# Altium PCB GPSR_v2.PcbDoc
Units mm, origin at the board's own origin, x right, y up, seen from the top; angles counter-clockwise.
Board outline 68.59 x 62.99 mm, 4 copper layers (Top, Inner Layer 2, Inner Layer 3, Bottom), stack 0.137 mm thick; 118 components, 78 nets, 386 pads, 223 vias.
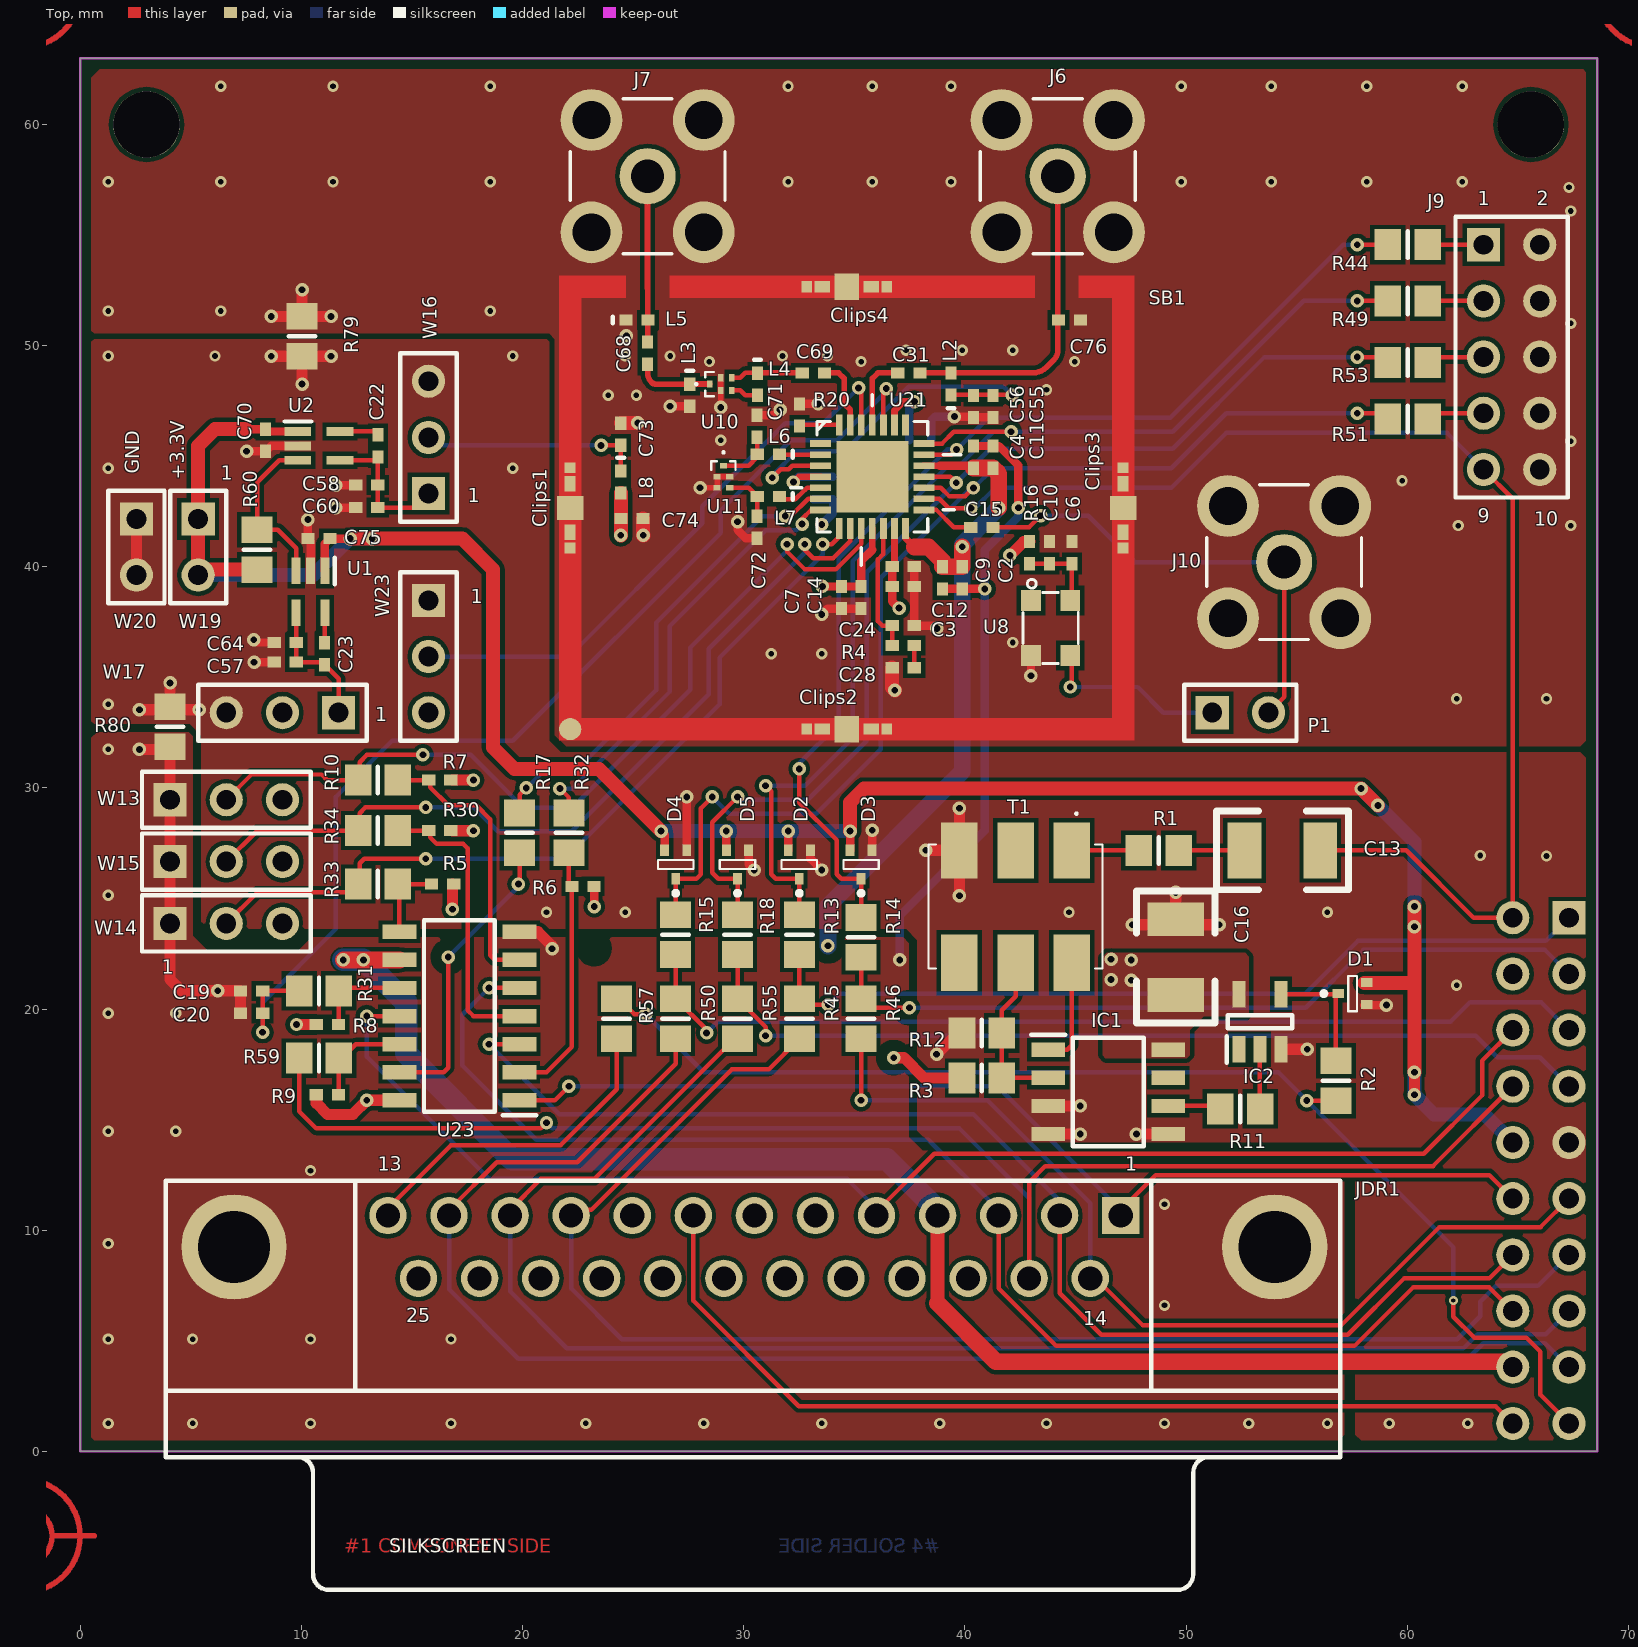
[diagram p0: Top view]
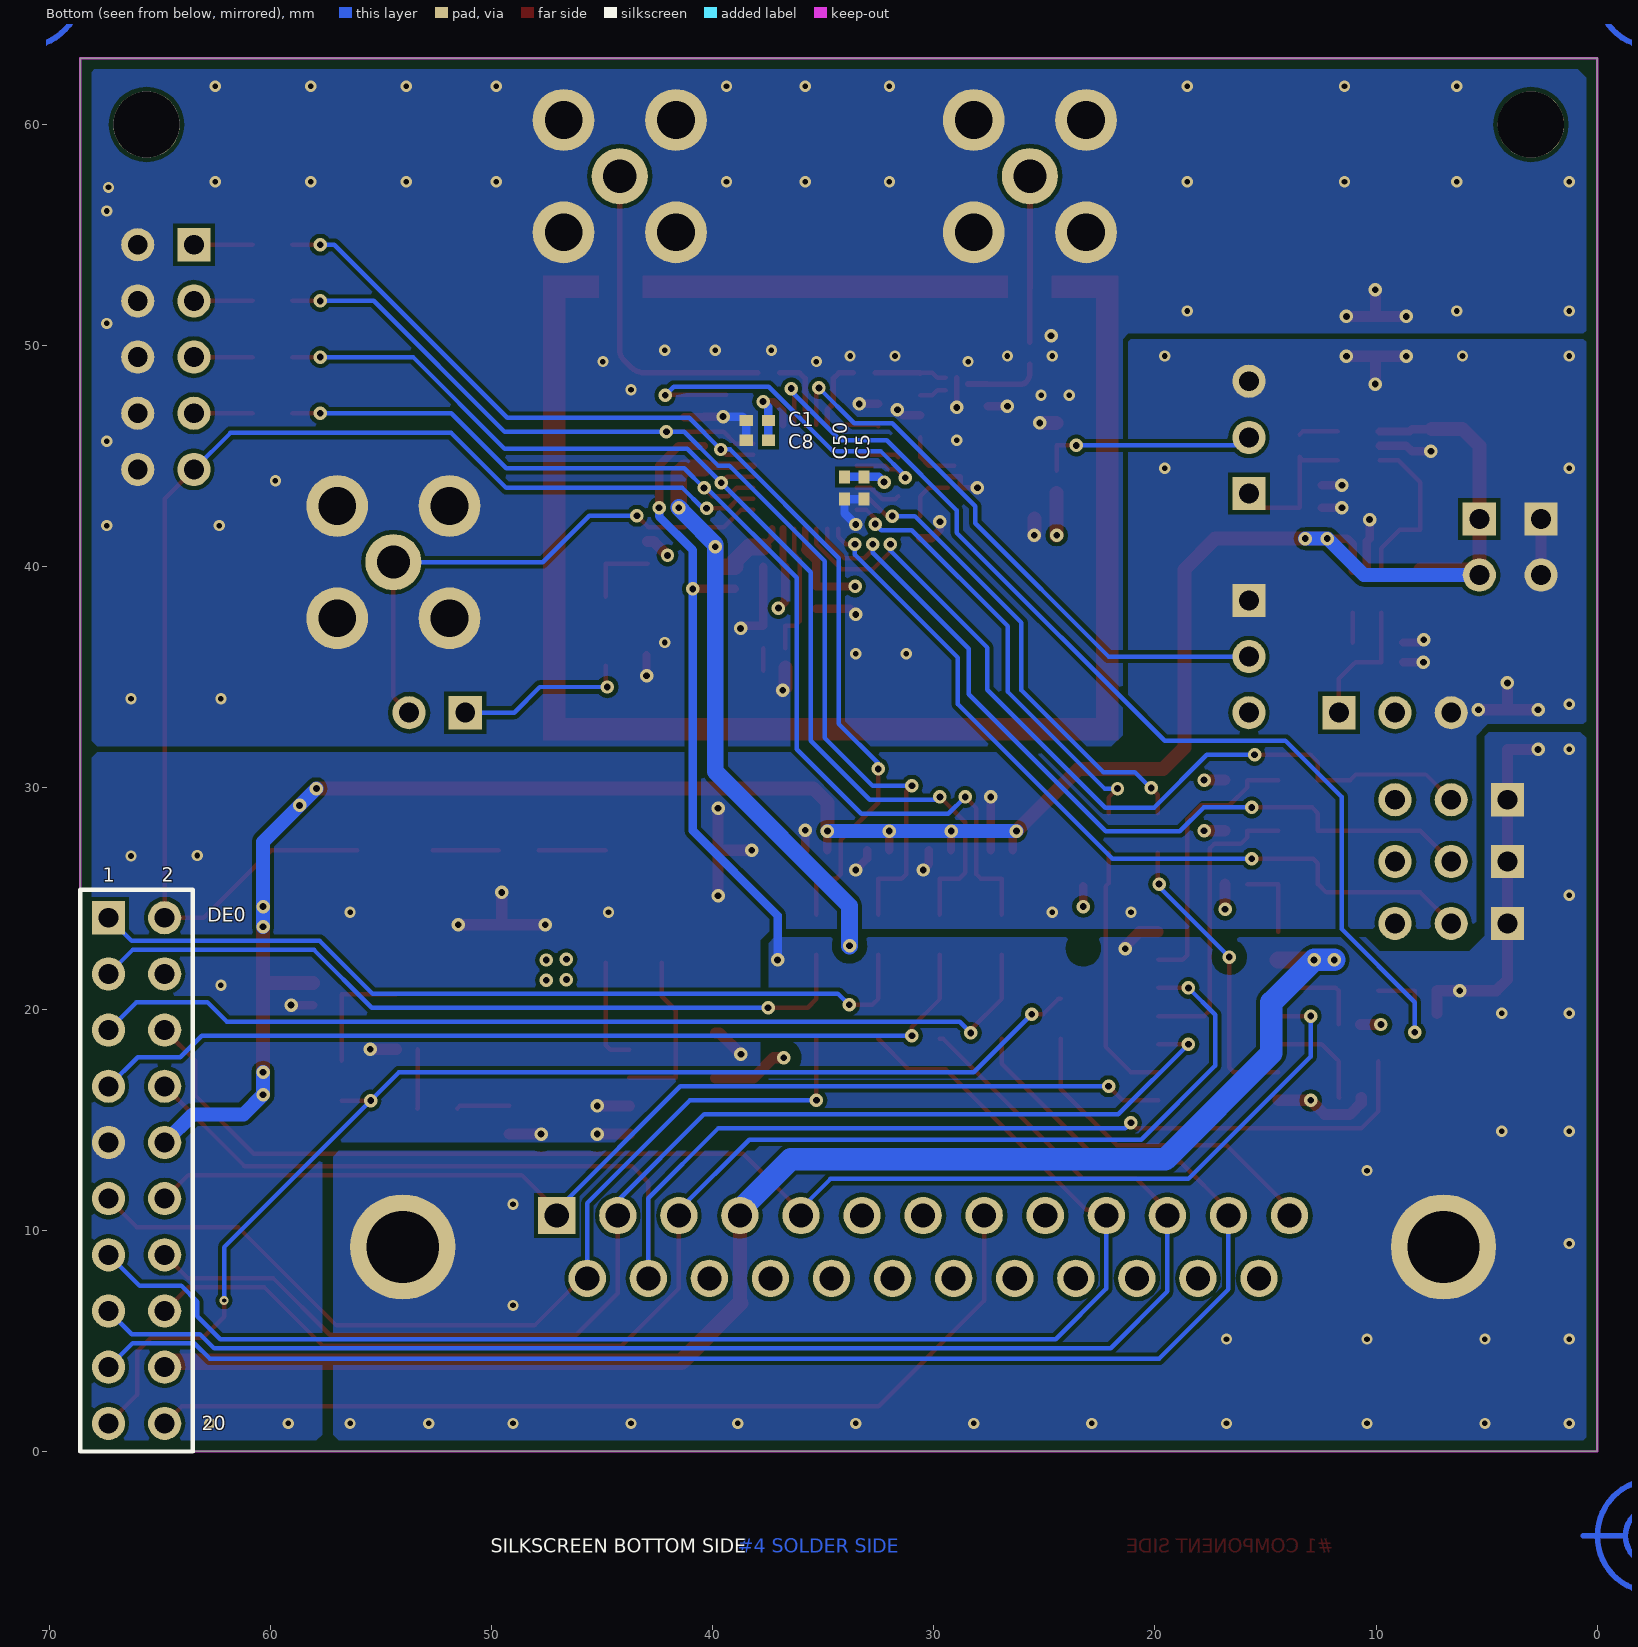
[diagram p1: Bottom view, seen from below]
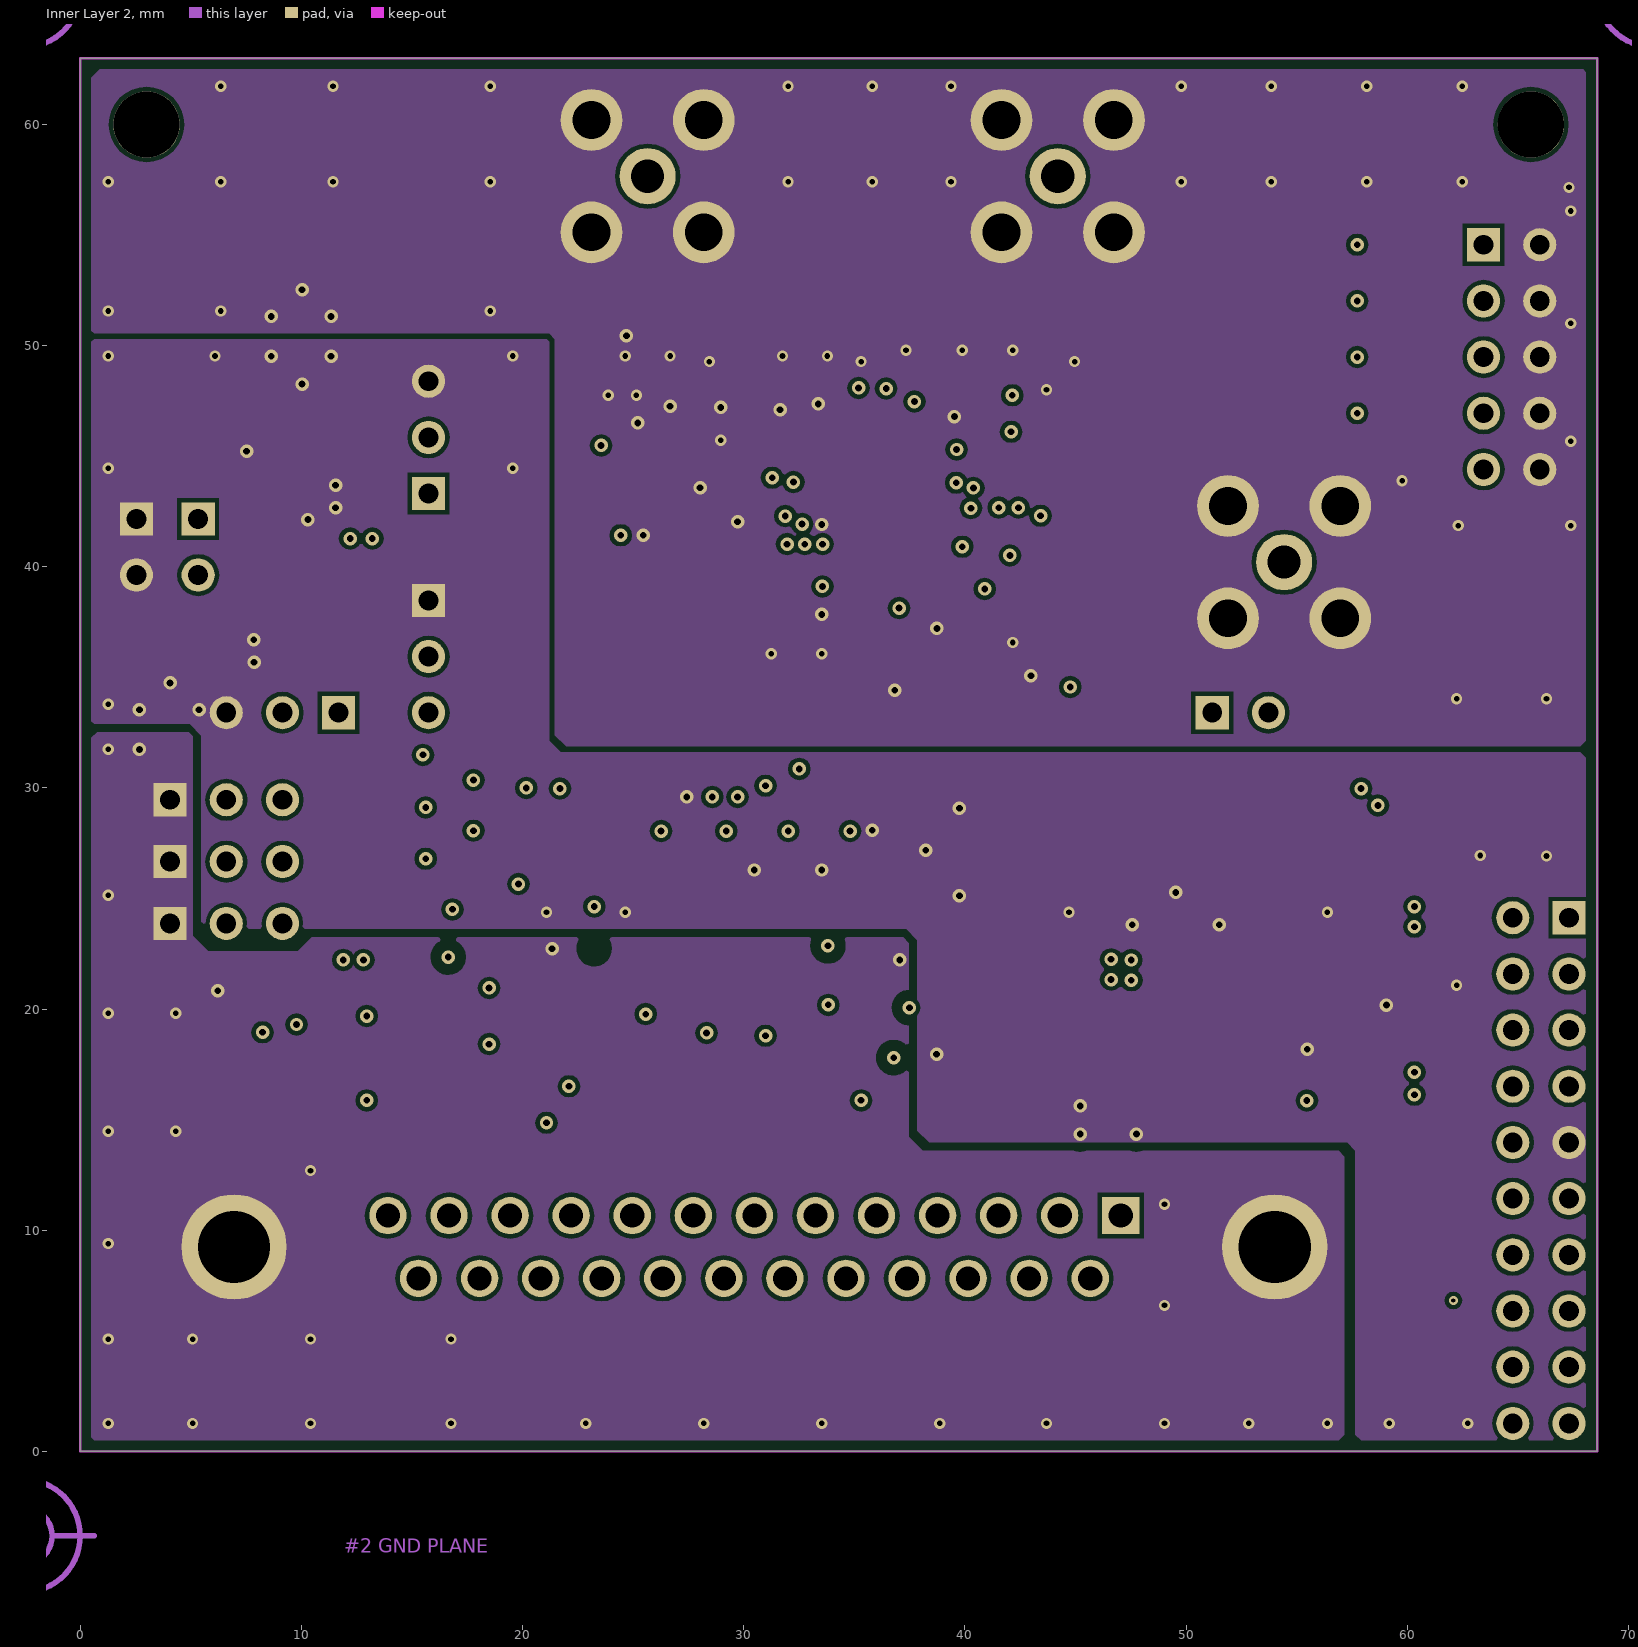
[diagram p2: Inner Layer 2]
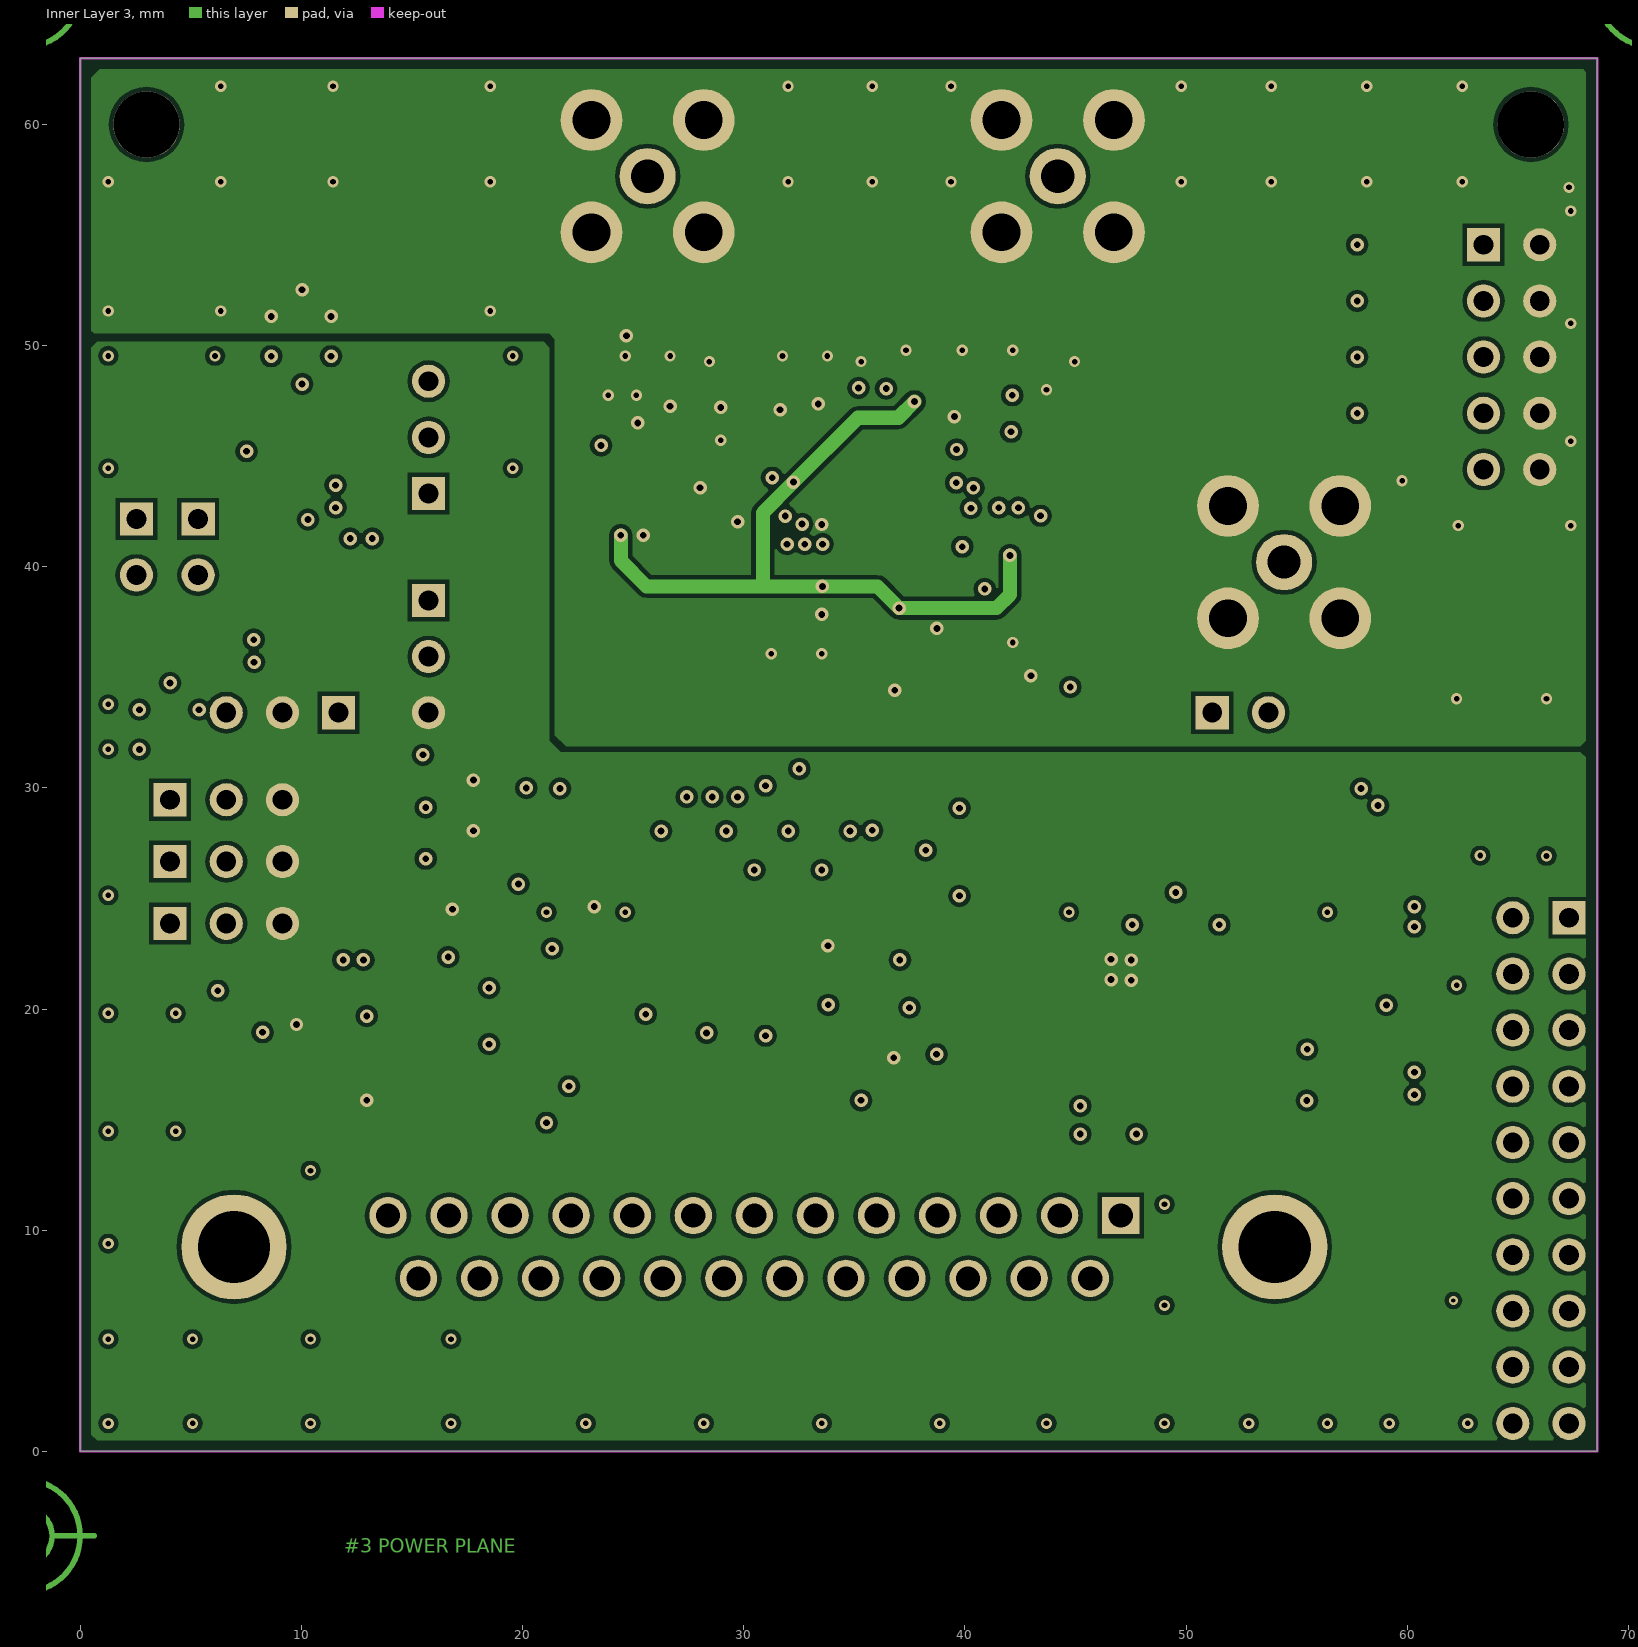
[diagram p3: Inner Layer 3]

## Layer stack, top to bottom
Solder Mask Top: solder mask 0.0102, Solder Resist, Dk 3.5
Top: signal copper 0.0343
Inner Layer 2: signal copper 0.0343
Inner Layer 3: signal copper 0.0343
Bottom: signal copper 0.0343
Solder Mask Bottom: solder mask 0.0102, Solder Resist, Dk 3.5

## Board outline
0,0 68.59,0 68.59,62.992 0,62.992

## Design rules (kind name [scope] priority, off if disabled: settings)
Clearance [All] p1: gap=0.191 ignorepadtopadclearanceinfootprint=FALSE except(0: Arc-Hole Track-Hole SMDPad-Hole THPad-Hole Via-Hole Fill-Hole Poly-Hole Region-Hole Text-Hole)
ComponentClearance "'Default' PADS rule_12" [All] p1 off: gap=0.203 collisioncheckmode=3 verticalgap=0.254 showdistances=FALSE
FlightTimeFalling "'Default' PADS rule_10" [All] p1: maximum=10.00
FlightTimeRising "'Default' PADS rule_9" [All] p1: maximum=10.00
Height [All] p1 off: minheight=0 maxheight=25.4 prefheight=12.7
HoleSize [All] p1: absolutevalues=TRUE maxlimit=3.81 minlimit=0.025 maxpercent=80.000 minpercent=20.000
HoleToHoleClearance [All] p1: gap=0.102 allowstackedmicrovias=TRUE
Length "'Default' PADS rule_5" [All] p1: maxlimit=1270 minlimit=0
MatchedLengths "'Default' PADS rule_11" [InNetClass('All Nets')] p1 off: tolerance=5.08 checknetsindiffpair=TRUE checkdiffpairvsdiffpair=FALSE checkxsignals=FALSE checkothers=FALSE
MaxMinImpedance "'Default' PADS rule_8" [All] p1: minimum=50.00 maximum=150.0
MinimumSolderMaskSliver [All] p1 off: minsoldermaskwidth=0.254
ParallelSegment "'Default' PADS rule_7" [All] p1: limit=25.4 gap=5.08
ParallelSegment "'Default' PADS rule_6" [All] p2: limit=25.4 gap=5.08
PasteMaskExpansion [All] p1 off: expansion=0
PlaneClearance "'Default' PADS rule_14" [All] p1: clearance=0.508
PlaneConnect [All] p1: planeconnectstyle=Direct reliefexpansion=0.508 reliefentries=4 reliefconductorwidth=0.254 reliefairgap=0.254
PolygonConnect PolygonConnect_1 [All] p1: connectstyle=Direct reliefconductorwidth=0.254 reliefentries=4 polygonreliefangle="90 Angle" airgapwidth=0.254
RoutingLayers "'Default' PADS rule_3" [All] p1: top layer_v5=TRUE mid layer 1_v5=TRUE mid layer 2_v5=TRUE bottom layer_v5=TRUE
RoutingPriority "'Default' PADS rule_2" [All] p1: routingpriority=3
RoutingTopology "'Default' PADS rule" [All] p1: topology=Shortest
RoutingVias "'Default' PADS rule_4" [All] p1: holewidth=0.94 width=1.397 viastyle="Through Hole" minholewidth=0.94 minwidth=1.397 maxholewidth=0.94 maxwidth=1.397
SMDToCorner "'Default' PADS rule_16" [All] p1 off: distance=76000
SMDToPlane "'Default' PADS rule_17" [All] p1 off: distance=120000
SilkToSilkClearance [All] p1 off: silktosilkclearance=0.254
SilkToSolderMaskClearance SilkscreenOverComponentPads [IsPad] p1 off: minsilkscreentomaskgap=0.254 clearancetoexposedcopper=TRUE
SolderMaskExpansion [All] p1: expansion=0.076 istentingtop=FALSE
Width "'Default' PADS rule_13" [All] p1: maxlimit=1.524 minlimit=0.203 preferedwidth=0.203
17 further rules are at their usual default settings.

## Components (designator, comment, footprint, x,y, rotation, side; value= is the part's Value field where it differs from the comment)
C1 "100pF" C0402 37.973,46.609 r0 bottom
C2 "0.1uF" C0402 39.878,39.497 r270 top
C3 "0.1uF" C0402 37.211,39.116 r0 top
C4 "100pF" C0402 40.386,44.958 r90 top
C5 "100pF" C0402 33.147,43.561 r270 bottom
C6 "10uF" C0402 44.831,40.64 r90 top
C7 "0.1uF" C0402 34.417,38.608 r270 top
C8 "0.1uF" C0402 37.973,45.72 r0 bottom
C9 "100pF" C0402 38.989,39.497 r270 top
C10 "100pF" C0402 43.815,40.64 r90 top
C11 "0.1uF" C0402 41.275,44.958 r90 top
C12 "100pF" C0402 37.211,40.005 r0 top
C13 "10nF" C1210 54.356,27.178 r180 top
C14 "100pF" C0402 35.306,38.608 r270 top
C15 "10nF" C0402 40.767,41.783 r180 top
C16 "0.1uF" C1210 49.53,22.352 r270 top
C19 "0.1uF" C0402 7.747,20.828 r0 top
C20 "100pF" C0402 7.747,19.812 r0 top
C22 "0.1uF" C0402 13.462,45.466 r90 top
C23 "0.1uF" C0402 11.049,36.068 r90 top
C24 "27pF" C0402 37.211,37.338 r0 top
C28 "0.47nF" C0402 37.211,35.433 r180 top
C31 "100pF" C0402 37.465,48.768 r0 top
C50 "0.1uF" C0402 34.036,43.561 r270 bottom
C55 "0.1uF" C0402 41.275,47.244 r270 top
C56 "100pF" C0402 40.386,47.244 r270 top
C57 "10nF" C0402 9.271,35.687 r180 top
C58 "10nF" C0402 12.954,43.688 r180 top
C60 "1uF" C0402 12.954,42.672 r0 top
C64 "1uF" C0402 9.271,36.576 r0 top
C68 "100pF" C0402 25.654,49.657 r90 top
C69 "100pF" C0402 33.147,48.768 r180 top
C70 "1uF" C0402 8.382,45.72 r90 top
C71 "NC" C0402 30.607,46.355 r90 top
C72 "NC" C0402 30.607,41.783 r90 top
C73 "1uF" C0402 24.44,45.993 r270 top
C74 "1uF" C0402 24.948,42.183 r180 top
C75 "1uF" C0402 10.795,41.275 r180 top
C76 "NC" C0402 44.729,51.156 r180 top
Clips1 "S0951-46R" S0951-46R 22.154,42.658 r90 top
Clips2 "S0951-46R" S0951-46R 34.654,32.658 r0 top
Clips3 "S0951-46R" S0951-46R 47.154,42.658 r90 top
Clips4 "S0951-46R" S0951-46R 34.654,52.658 r0 top
D1 "BAT54STA" BAT54STA 57.15,20.701 r90 top
D2 "BAT54STA" BAT54STA 32.512,26.162 r180 top
D3 "BAT54STA" BAT54STA 35.306,26.162 r180 top
D4 "BAT54STA" BAT54STA 26.924,26.162 r180 top
D5 "BAT54STA" BAT54STA 29.718,26.162 r180 top
DE0 "Female Header 10X2" HDR2X10 67.31,24.13 r270 bottom
IC1 "MAX961ESA+" SOIC127P600X175-8N 46.482,16.256 r0 top
IC2 "SN74LV1T34DBVRG4" SOT95P280X145-5N 53.34,19.431 r90 top
J6 "SMA" SMA-JACK 44.196,57.658 r0 top
J7 "SMA" SMA-JACK 25.654,57.658 r0 top
J9 "Header 5X2" HDR2X5 63.449,54.559 r270 top
J10 "SMA" SMA-JACK 54.432,40.208 r0 top
JDR1 "D Connector 25" DSUB1.385-2H25A 30.48,-0.254 r180 top
L2 "33nH" 0402-A 39.37,48.26 r90 top
L3 "NC" 0402-A 27.559,47.752 r270 top
L4 "NC" 0402-A 30.615,48.252 r270 top
L5 "33nH" 0402-A 25.171,51.156 r0 top
L6 "0R" 0402-A 31.115,45.085 r180 top
L7 "0R" 0402-A 31.115,43.18 r180 top
L8 "0R_Bead" 0402-A 24.44,43.834 r270 top
P1 "Header 2" HDR1X2 51.181,33.401 r0 top
R1 "0R" 6-0805_N 48.768,27.178 r180 top
R2 "47R" 6-0805_N 56.769,16.764 r90 top
R3 "5.1K" 6-0805_N 40.767,16.891 r180 top
R4 "20K" R0402 37.211,36.449 r180 top
R5 "10K" R0402 16.383,25.654 r0 top
R6 "10K" R0402 22.733,25.552 r0 top
R7 "10K" R0402 16.256,30.353 r0 top
R8 "10K" R0402 11.176,19.304 r180 top
R9 "10K" R0402 11.176,16.129 r0 top
R10 "0R" 6-0805_N 13.462,30.353 r180 top
R11 "0R" 6-0805_N 52.451,15.494 r0 top
R12 "5.1K" 6-0805_N 40.767,18.923 r0 top
R13 "47R" 6-0805_N 32.512,23.368 r90 top
R14 "47R" 6-0805_N 35.306,23.241 r90 top
R15 "47R" 6-0805_N 26.924,23.368 r90 top
R16 "22.1R" R0402 42.926,40.64 r270 top
R17 "0R" 6-0805_N 19.863,27.965 r90 top
R18 "47R" 6-0805_N 29.718,23.368 r90 top
R20 "100K" R0402 32.512,46.863 r270 top
R30 "10K" R0402 16.256,28.067 r0 top
R31 "0R" 6-0805_N 10.795,20.828 r0 top
R32 "0R" 6-0805_N 22.098,27.965 r90 top
R33 "0R" 6-0805_N 13.462,25.654 r180 top
R34 "0R" 6-0805_N 13.462,28.067 r180 top
R44 "0R" 6-0805_N 60.02,54.559 r180 top
R45 "0R" 6-0805_N 32.512,19.558 r90 top
R46 "0R" 6-0805_N 35.306,19.558 r90 top
R49 "0R" 6-0805_N 60.02,52.019 r180 top
R50 "0R" 6-0805_N 26.924,19.558 r90 top
R51 "0R" 6-0805_N 60.02,46.685 r180 top
R53 "0R" 6-0805_N 60.02,49.225 r180 top
R55 "0R" 6-0805_N 29.718,19.558 r90 top
R57 "0R" 6-0805_N 24.257,19.558 r90 top
R59 "0R" 6-0805_N 10.795,17.78 r0 top
R60 "0R" 6-0805_N 8.001,40.767 r90 top
R79 "0R" 6-0805_N 10.033,50.419 r90 top
R80 "0R" 6-0805_N 4.064,32.766 r270 top
SB1 "S02-25200300" S02-25200300 22.154,32.658 r0 top
T1 "ADT1-6T+" ADT16T 42.291,24.638 r180 top
U1 "MAX8510EXK29+T" SOT65P210X110-5N 10.414,38.862 r270 top
U2 "MAX8510EXK29+T" SOT65P210X110-5N 10.795,45.466 r0 top
U8 "D32G-016.368M" OSC3225 43.871,37.23 r180 top
U10 "SF14-1575F5UUA1" SF141575F5UUA1 28.956,48.26 r0 top
U11 "RSF-1575.420-2000-1411-TR" SF141575F5UUA1 29.083,44.069 r270 top
U21 "MAX2769ETI+" TQFN28P$5C$0.5 35.814,44.069 r0 top
U23 "SN74LV07ADR" SOIC127P600X175-14N 17.145,19.685 r180 top
W13 "Header 1x3" HDR1X3 4.064,29.464 r0 top
W14 "Header 1x3" HDR1X3 4.064,23.876 r0 top
W15 "Header 1x3" HDR1X3 4.064,26.67 r0 top
W16 "Header 1x3" HDR1X3 15.748,43.307 r90 top
W17 "Header 1x3" HDR1X3 11.684,33.401 r180 top
W19 "Header 2" HDR1X2 5.334,42.164 r270 top
W20 "Header 2" HDR1X2 2.54,42.164 r270 top
W23 "Header 1x3" HDR1X3 15.748,38.481 r270 top

## Footprints (in the part's own frame and the unit in brackets; to place one, negate y for a bottom-side part, rotate by r counter-clockwise, add the part's x,y. Pads: shape width x height; smd on the part's side, far side on the other; paste and mask are expansions set on the pad)
6-0805_N [mm] "Chip Resistor, Body 2.0x1.2mm, IPC Medium Density"
  rect 1.2x1.4 smd: 1(-0.9,0) 2(0.9,0)
  silkscreen extent 0,-0.6 0,0.6, body extent -1.07,-0.7 1.07,0.7, height 0.7
0402-A [mm] "Chip Inductor, Body 1.0x0.5mm, IPC High Density"
  rect 0.6x0.5 smd: 1(-0.5,0) 2(0.5,0)
  silkscreen extent -1.1,-0.15 -1.1,0.15, body extent -0.55,-0.3 0.55,0.3, height 0.55
ADT16T [mm]
  rect 1.65x2.54 smd: 1(-2.54,-2.54) 2(0,-2.54) 3(2.54,-2.54) 4(2.54,2.54) 5(0,2.54) 6(-2.54,2.54)
  silkscreen extent -3.94,-4.25 3.94,2.8
BAT54STA [mm]
  rect 0.4x0.51 smd: 1(0,0.268) 2(0.5,-1.022) 3(-0.5,-1.022)
  silkscreen extent -0.8,-0.58 0.8,1.02
C0402 [mm]
  rect 0.6x0.5 smd: 1(-0.5,0) 2(0.5,0)
  body extent -0.55,-0.3 0.55,0.3, height 1.3
C1210 [mil]
  rect 60x100 smd: 1(-67.5,0) 2(67.5,0)
  silkscreen extent -118,-70 118,70
DSUB1.385-2H25A [mm] "Connector; D Subminiature; 25 Position; Right Angle; Pitch 1.385 mm"
  rect 1.69x1.69 hole 1.09: 1(-16.566,-10.92)
  round 1.69 hole 1.09: 2(-13.805,-10.92) 3(-11.044,-10.92) 4(-8.283,-10.92) 5(-5.522,-10.92) 6(-2.761,-10.92) 7(0,-10.92) 8(2.761,-10.92) 9(5.522,-10.92) 10(8.283,-10.92) 11(11.044,-10.92) 12(13.805,-10.92) 13(16.566,-10.92) 14(-15.185,-8.08) 15(-12.424,-8.08) 16(-9.663,-8.08) 17(-6.902,-8.08) 18(-4.141,-8.08) 19(-1.38,-8.08) 20(1.381,-8.08) 21(4.142,-8.08) 22(6.903,-8.08) 23(9.664,-8.08) 24(12.425,-8.08) 25(15.186,-8.08)
  round 4.76 hole 3.26: 26(-23.526,-9.5) 27(23.526,-9.5)
  silkscreen extent -26.5,-12.5 26.6,6
HDR1X2 [mm] "Connector; Header; 2 Position"
  rect 1.5x1.5 hole 0.9: 1(0,0)
  round 1.5 hole 0.9: 2(2.54,0)
  silkscreen extent -1.27,-1.27 3.81,1.27
HDR1X3 [mm] "Connector; Header; 3 Position"
  rect 1.5x1.5 hole 0.9: 1(0,0)
  round 1.5 hole 0.9: 2(2.54,0) 3(5.08,0)
  silkscreen extent -1.27,-1.27 6.35,1.27
HDR2X5 [mm] "Connector; Header; 5x2 Position"
  rect 1.5x1.5 hole 0.9: 1(0,0)
  round 1.5 hole 0.9: 2(0,2.54) 3(2.54,0) 4(2.54,2.54) 5(5.08,0) 6(5.08,2.54) 7(7.62,0) 8(7.62,2.54) 9(10.16,0) 10(10.16,2.54)
  silkscreen extent -1.27,-1.27 11.43,3.81
HDR2X10 [mm] "Connector; Header; 10x2 Position"
  rect 1.5x1.5 hole 0.9: 1(0,0)
  round 1.5 hole 0.9: 2(0,2.54) 3(2.54,0) 4(2.54,2.54) 5(5.08,0) 6(5.08,2.54) 7(7.62,0) 8(7.62,2.54) 9(10.16,0) 10(10.16,2.54) 11(12.7,0) 12(12.7,2.54) 13(15.24,0) 14(15.24,2.54) 15(17.78,0) 16(17.78,2.54) 17(20.32,0) 18(20.32,2.54) 19(22.86,0) 20(22.86,2.54)
  silkscreen extent -1.27,-1.27 24.13,3.81
OSC3225 [mm]
  rect 0.89x0.94 smd: 1(0.885,-1.24) 2(0.885,1.24) 3(-0.885,1.24) 4(-0.885,-1.24)
  silkscreen extent -1.25,-2.2 1.25,1.6
R0402 [mm]
  rect 0.6x0.5 smd: 1(-0.5,0) 2(0.5,0)
  body extent -0.55,-0.3 0.55,0.3, height 1.3
S02-25200300 [mm]
  round 1 smd: 1(0,0)
  Top region: 2.5,20.5 2.5,19.5 0.5,19.5 0.5,20.5
  Top region: 24.5,19.5 23,19.5 23,20.5 24.5,20.5
  Top region: -0.5,20.5 0.5,20.5 0.5,-0.5 -0.5,-0.5
  Top region: 0.5,-0.5 25.5,-0.5 25.5,0.5 0.5,0.5
  Top region: 25.5,0.5 25.5,20.5 24.5,20.5 24.5,0.5
  Top region: 4.5,19.5 4.5,20.5 21,20.5 21,19.5
S0951-46R [mm]
  rect 0.7x0.5 smd: 1(-1.1,0) 2(1.1,0)
  rect 0.48x0.5 smd: 3(-1.81,0) 4(1.81,0)
  rect 1.1x1.2 smd: 5(0,0)
SF141575F5UUA1 [mm]
  rect 0.25x0.325 smd: 1(-0.5,0) 2(0,-0.287) 3(0.5,-0.287) 4(0.5,0.287) 5(0,0.287)
  silkscreen extent -1.15,-0.55 -0.3,0.55, body extent -0.7,-0.55 0.7,0.55, height 0.8
SMA-JACK [mil]
  round 100 hole 59: 1(0,0)
  round 110 hole 67: 2(-100,-100) 3(-100,100) 4(100,100) 5(100,-100)
  silkscreen extent -138,-138 138,138
SOIC127P600X175-8N [mm]
  rect 1.525x0.65 smd: 1(-2.712,1.905) 2(-2.712,0.635) 3(-2.712,-0.635) 4(-2.712,-1.905) 5(2.712,-1.905) 6(2.712,-0.635) 7(2.712,0.635) 8(2.712,1.905)
  silkscreen extent -3.47,-2.45 1.6,2.58, body extent -3,-2.45 3,2.45, height 1.75
SOIC127P600X175-14N [mm]
  rect 1.525x0.65 smd: 1(-2.712,3.81) 2(-2.712,2.54) 3(-2.712,1.27) 4(-2.712,0) 5(-2.712,-1.27) 6(-2.712,-2.54) 7(-2.712,-3.81) 8(2.712,-3.81) 9(2.712,-2.54) 10(2.712,-1.27) 11(2.712,0) 12(2.712,1.27) 13(2.712,2.54) 14(2.712,3.81)
  silkscreen extent -3.47,-4.33 1.6,4.48, body extent -3.01,-4.33 3.01,4.33, height 1.75
SOT65P210X110-5N [mm]
  rect 1.2x0.4 smd: 1(-0.95,0.65) 2(-0.95,0) 3(-0.95,-0.65) 4(0.95,-0.65) 5(0.95,0.65)
  silkscreen extent -1.55,1.1 -0.35,1.1, body extent -1.05,-1 1.05,1, height 1
SOT95P280X145-5N [mm]
  rect 1.2x0.6 smd: 1(-1.25,0.95) 2(-1.25,0) 3(-1.25,-0.95) 4(1.25,-0.95) 5(1.25,0.95)
  silkscreen extent -1.85,-1.45 0.3,1.5, body extent -1.4,-1.45 1.4,1.45, height 1.2
TQFN28P$5C$0.5 [mil]
  rect 37x12 smd: 1(-92.13,59.06) 2(-92.13,39.37) 3(-92.13,19.69) 4(-92.13,0) 5(-92.13,-19.68) 6(-92.13,-39.37) 7(-92.13,-59.06) 15(92.13,-59.06) 16(92.13,-39.37) 17(92.13,-19.68) 18(92.13,0) 19(92.13,19.69) 20(92.13,39.37) 21(92.13,59.06)
  rect 12x37 smd: 8(-59.06,-92.13) 9(-39.37,-92.13) 10(-19.69,-92.13) 11(0,-92.13) 12(19.68,-92.13) 13(39.37,-92.13) 14(59.06,-92.13) 22(59.06,92.13) 23(39.37,92.13) 24(19.68,92.13) 25(0,92.13) 26(-19.69,92.13) 27(-39.37,92.13) 28(-59.06,92.13)
  rect 128x128 smd: 29(0,0)
  silkscreen extent -146,-157 157,146

## Part data
C1 C2 C3 C4 C5 C6 C7 C8 C9 C10 C11 C12 C14 C15 C19 C20 C22 C23 C24 C28 C31 C50 C55 C56 C57 C58 C60 C64 C68 C69 C70 C71 C72 C73 C74 C75 C76: library part "Cap Semi", "Capacitor (Semiconductor SIM Model)"
C13 C16: library part Cap, "Capacitor"
Clips1 Clips2 Clips3 Clips4 SB1: library part ShieldingBox-3pin-27x17
D1 D2 D3 D4 D5: "Schottky Diode"
DE0: library part "Header 10X2", "Female Header, 10-Pin, Dual row"
IC1 IC2: "Integrated Circuit"
J6 J7 J10: library part COAX-F
J9: "Header, 5-Pin, Dual row"
JDR1: "Receptacle Assembly, 25 Position, Right Angle"
L2 L3 L4 L5 L6 L7 L8: library part Inductor, "Inductor"
P1 W19 W20: "Header, 2-Pin"
R1 R2 R3 R11 R12 R13 R14 R15 R18: library part Res1, "Resistor"
R4 R5 R6 R7 R8 R9 R10 R16 R17 R20 R30 R31 R32 R33 R34 R44 R45 R46 R49 R50 R51 R53 R55 R57 R59 R60 R79 R80: library part Res3, "Resistor"
T1: "Transformer"
U1 U2: library part MAX8510EXK29+
U8 U10 U11: library part Component_1
U21: "GPS IC"
W13 W14 W15 W16 W17 W23: library part "Header 3", "Header, 3-Pin"

## Free pads (board coordinates)
  round 3 hole 3 unplated: 3(3,59.992) 3(65.59,59.992)

## Via types
v1: diameter 0.61, hole 0.305, Top to Bottom, tented both sides, 131 vias
v2: diameter 0.508, hole 0.254, Top to Bottom, tented both sides, 91 vias
v3: diameter 0.4, hole 0.2, Top to Bottom, tented both sides, 1 vias

## Nets (pads, with @x,y where several pads share a name; then routed paths per layer and width w, separated by ;. In a path a pad name is that pad's centre, name@x,y a point inside that pad or via, vN(x,y) a via of type N, cw(c..) or ccw(c..) an arc to the next point about the centre after c; other vN are vias at no path point)
3.3V: C70.2 C75.1 D1.2 D2.2 D3.2 D4.2 D5.2 DE0.10 R60.1 U1.1 U2.1 W19.1 W19.2 | length 111
  Top w0.381: 7.501,46.22 C70.2 8.486,46.116 U2.1 ; U1.1 11.064,41.044 11.295,41.275 v1(12.204,41.275) ; v1(26.264,28.049) 26.424,27.888 D4.2@26.424,27.184 ; v1(29.21,28.049) 29.21,27.94 29.218,27.932 D5.2@29.218,27.184 ; D2.2@32.012,27.184 v1(32.012,28.049) ; D3.2@34.806,27.184 v1(34.806,28.049)
  Top w0.508: v1(60.325,16.129) v1(60.325,17.145)
  Top w0.635: 7.501,46.22 6.088,46.22 5.334,45.466 W19.1 W19.2 5.577,39.867 R60.1 ; v1(12.204,41.275) v1(13.208,41.275) 17.272,41.275 18.669,39.878 18.669,31.826 19.634,30.861 23.451,30.861 v1(26.264,28.049) ; v1(34.806,28.049) 34.806,29.337 35.441,29.972 v1(57.912,29.972) v1(58.674,29.21) ; D1.2@58.059,21.181 58.172,21.181 60.297,21.181 60.325,21.209 ; v1(60.325,17.145) 60.325,21.209 ; v1(60.325,24.638) v1(60.325,23.724) 60.325,21.209
  Bottom w0.635: W19.2 10.553,39.624 v1(12.204,41.275) v1(13.208,41.275) ; v1(26.264,28.049) v1(29.21,28.049) v1(32.012,28.049) v1(34.806,28.049) ; v1(57.912,29.972) v1(58.674,29.21) 60.325,27.559 v1(60.325,24.638) v1(60.325,23.724) ; v1(60.325,17.145) v1(60.325,16.129) 61.214,15.24 63.5,15.24 DE0.10
AGND: C1.2 C3.2 C5.2 C6.2 C7.2 C8.2 C10.2 C12.2 C14.2 C24.2 C28.2 C50.2 C55.2 C56.2 C71.2 C72.1 C73.1 C74.1 C76.1 Clips1.1 Clips1.2 Clips1.3 Clips1.4 Clips1.5 Clips2.1 Clips2.2 Clips2.3 Clips2.4 Clips2.5 Clips3.1 Clips3.2 Clips3.3 Clips3.4 Clips3.5 Clips4.1 Clips4.2 Clips4.3 Clips4.4 Clips4.5 J6.2 J6.3 J6.4 J6.5 J7.2 J7.3 J7.4 J7.5 J9.2 J9.4 J9.6 J9.8 J9.10 J10.2 J10.3 J10.4 J10.5 L3.2 L5.1 R20.1 R79.2 SB1.1 U8.2 U10.2 U10.5 U11.2 U11.3 U11.5 | length 26.6
  Top w0.254: v1(28.024,43.569) U11.3 U11.2 U11.5 ; v1(28.956,47.201) U10.2 U10.5
  Top w0.381: v1(26.67,47.252) L3.2 ; v1(29.718,42.037) 29.718,41.664 30.099,41.283 C72.1 ; C71.2 31.402,46.855 v1(31.644,47.097) ; R20.1 v1(33.372,47.363) ; v1(33.528,37.846) 33.79,38.108 C7.2 C14.2 ; C12.2 C3.2 C24.2 38.608,37.338 v1(38.735,37.211) ; v1(39.526,46.789) 40.365,46.789 40.386,46.768 41.275,46.768 C55.2@41.283,46.768 ; v1(42.982,35.071) 42.986,35.075 U8.2
  Top w0.508: v1(8.636,51.319) R79.2 ; v1(10.033,52.528) R79.2 ; v1(11.343,51.319) R79.2
  Top w0.635: C73.1 25.194,46.493 v1(25.202,46.501) ; C74.1 25.448,41.429 v1(25.456,41.421) ; C28.2 36.711,34.536 v1(36.83,34.417)
  Bottom w0.381: C5.2 C50.2 34.036,42.418 v1(33.528,41.91) ; C8.2 C1.2 38.653,46.789 v1(39.526,46.789)
  other v1: 24.694,50.438
  other v2: 62.23,34.036 66.294,34.036 31.242,36.068 33.528,36.068 42.164,36.576 62.306,41.859 67.386,41.859 59.766,43.891 67.386,45.669 28.956,45.72 23.876,47.752 25.146,47.752 43.688,48.006 28.448,49.276 35.306,49.276 44.958,49.276 24.638,49.53 26.67,49.53 31.75,49.53 33.782,49.53 37.338,49.784 39.878,49.784 42.164,49.784 67.386,51.003 1.27,51.562 6.35,51.562 18.542,51.562 67.386,56.083 67.31,57.15 1.27,57.404 6.35,57.404 11.43,57.404 18.542,57.404 32.004,57.404 35.814,57.404 39.37,57.404 49.784,57.404 53.848,57.404 58.166,57.404 62.484,57.404 6.35,61.722 11.43,61.722 18.542,61.722 32.004,61.722 35.814,61.722 39.37,61.722 49.784,61.722 53.848,61.722 58.166,61.722 62.484,61.722
CLK: JDR1.13 R57.1 | length 14.9
  Top w0.203: JDR1.13@13.914,10.92 13.914,10.993 16.764,13.843 21.717,13.843 24.257,16.383 R57.1
CLK_BUF: DE0.19 R2.1 R57.2 | length 55.3
  Top w0.203: R57.2 24.373,20.458 25.059,19.772 v1(25.567,19.772) ; v1(55.459,15.864) R2.1 ; v3(62.083,6.826) 62.083,6.09 63.023,5.15 65.385,5.15 66.02,4.515 66.02,2.56 DE0.19
  Bottom w0.203: v1(25.567,19.772) 28.194,17.145 54.178,17.145 v1(55.459,15.864) 62.083,9.241 v3(62.083,6.826)
CLK_OUT: C13.1 DE0.2 J9.9 U21.16 | length 58.3
  Top w0.203: U21.16 38.846,43.069 39.265,42.65 v1(40.269,42.65) ; C13.1 59.949,27.178 62.997,24.13 DE0.2 64.77,43.078 J9.9
  Bottom w0.203: v1(40.269,42.65) 40.45,42.65 41.361,43.561 49.327,43.561 51.816,46.05 61.798,46.05 J9.9
CS_B: R10.2 U21.10 W13.2 | length 39.3
  Top w0.203: W13.2 7.747,30.607 10.922,30.607 11.176,30.353 R10.2 12.633,30.353 12.633,31.166 12.963,31.496 v1(15.494,31.496) ; v1(31.957,41.021) 31.957,40.687 32.766,39.878 34.163,39.878 35.314,41.029 U21.10
  Bottom w0.203: v1(15.494,31.496) 17.653,31.496 20.041,29.108 22.25,29.108 27.584,34.442 27.584,36.347 31.957,40.72 v1(31.957,41.021)
CS_B_IN: DE0.16 JDR1.3 U23.5 | length 61.7
  Top w0.203: v1(18.485,20.955) U23.5 ; JDR1.3@41.524,10.92 JDR1.3 41.524,7.371 44.126,4.769 57.612,4.769 60.26,7.417 63.703,7.417 DE0.16
  Bottom w0.203: v1(18.485,20.955) 17.272,19.742 17.272,17.45 20.625,14.097 38.347,14.097 JDR1.3@41.524,10.92
D1: D1.1 IC2.4 R2.2 | length 5.5
  Top w0.203: IC2.4 56.769,20.681 R2.2
D2: D2.1 R13.2 R49.2 U21.21 | length 53
  Top w0.203: v1(30.988,30.099) 31.242,29.845 31.242,26.097 31.445,25.894 D2.1 R13.2 ; U21.21 38.965,45.569 39.497,46.101 v1(42.088,46.101) ; v1(57.734,52.019) R49.2@58.993,52.019
  Bottom w0.203: v1(30.988,30.099) 32.766,30.099 34.925,32.258 34.925,40.259 39.243,44.577 39.751,44.577 41.275,46.101 v1(42.088,46.101) 49.403,46.101 55.321,52.019 v1(57.734,52.019)
D3: D3.1 R14.2 R44.2 U21.20 | length 50.7
  Top w0.203: v1(32.512,30.861) 32.512,29.337 34.207,27.642 34.207,26.097 34.41,25.894 D3.1 R14.2@35.306,24.268 ; U21.20 39.392,45.069 v1(39.624,45.301) ; v1(57.734,54.559) R44.2@58.993,54.559
  Bottom w0.203: v1(32.512,30.861) 32.512,31.115 34.29,32.893 34.29,40.386 39.205,45.301 v1(39.624,45.301) 41.059,46.736 49.276,46.736 57.099,54.559 v1(57.734,54.559)
D4: D4.1 R15.2 R51.2 U21.17 | length 51.9
  Top w0.203: R15.2 D4.1 27.864,25.894 28.067,26.097 28.067,29.083 v1(28.575,29.591) ; U21.17 38.906,43.569 39.28,43.195 40.02,43.195 v1(40.386,43.561) ; v1(57.734,46.939) R51.2@58.993,46.939
  Bottom w0.203: v1(28.575,29.591) 29.337,28.829 33.274,28.829 36.195,31.75 36.195,39.497 40.259,43.561 v1(40.386,43.561) 41.275,44.45 49.327,44.45 51.816,46.939 v1(57.734,46.939)
D5: D5.1 R18.2 R53.2 U21.18 | length 50.4
  Top w0.203: R18.2 D5.1 28.843,25.894 28.575,26.162 28.575,28.448 v1(29.718,29.591) ; U21.18 39.334,44.069 v1(39.606,43.797) ; v1(57.734,49.479) R53.2@58.993,49.479
  Bottom w0.203: v1(29.718,29.591) 29.845,29.464 32.893,29.464 35.56,32.131 35.56,39.751 v1(39.606,43.797) 41.148,45.339 49.403,45.339 53.543,49.479 v1(57.734,49.479)
D_IN: DE0.18 JDR1.4 U23.9 | length 66.9
  Top w0.635: 38.763,6.703 JDR1.4 JDR1.4@38.763,10.92
  Top w0.762: v1(11.893,22.225) v1(12.807,22.225) U23.9 ; 38.763,6.703 41.408,4.058 64.522,4.058 DE0.18
  Bottom w1.016: v1(11.893,22.225) v1(12.807,22.225) 14.732,20.3 14.732,18.009 19.533,13.208 36.475,13.208 JDR1.4@38.763,10.92
DATA: R33.2 U21.8 W14.2 | length 37.4
  Top w0.203: W14.2 8.001,25.273 12.252,25.273 12.598,25.618 12.633,25.654 12.633,26.594 12.836,26.797 v1(15.621,26.797) ; v1(33.562,41.021) 33.984,41.021 34.314,41.351 U21.8
  Bottom w0.203: v1(15.621,26.797) 21.92,26.797 28.905,33.782 28.905,35.89 33.562,40.547 v1(33.562,41.021)
DGND: C2.2 C4.2 C9.2 C11.2 C19.1 C20.1 JDR1.26 JDR1.27 R80.2 U23.7 W13.1 W14.1 W15.1 | length 46.9
  Top w0.381: C9.2 C2.2 v1(40.894,38.997) ; C4.2 C11.2 41.537,45.458 42.418,44.577 v1(42.418,42.672)
  Top w0.508: v1(2.678,31.739) 4.064,31.739 W13.1 W15.1 W14.1 4.064,21.336 4.572,20.828 v1(6.223,20.828) C19.1 C20.1 ; U23.7 20.701,23.495 21.336,22.86 v1(21.336,22.733)
  Bottom w0.381: v1(37.059,22.225) 37.059,24.232 40.894,28.067 v1(40.894,38.997) 40.894,40.752 42.418,42.276 v1(42.418,42.672)
  other v2: 1.27,1.27 5.08,1.27 10.414,1.27 16.764,1.27 22.86,1.27 28.194,1.27 33.528,1.27 38.862,1.27 43.688,1.27 49.022,1.27 52.832,1.27 56.388,1.27 1.27,5.08 5.08,5.08 10.414,5.08 16.764,5.08 49.022,6.604 1.27,9.398 49.022,11.176 10.414,12.7 1.27,14.478 4.318,14.478 1.27,19.812 4.318,19.812 1.27,25.146 1.27,31.75
GND: C16.1 C57.2 C58.2 C60.1 C64.1 C70.1 C75.2 D1.3 D2.3 D3.3 D4.3 D5.3 DE0.9 IC1.3 IC1.4 IC1.5 IC2.3 R12.1 R79.1 R80.1 T1.3 U1.2 U2.2 W16.3 W17.3 W20.1 W20.2 W23.1 | length 43.3
  Top w0.381: v1(7.522,45.22) C70.1 8.628,45.466 U2.2 ; v1(7.849,36.703) 7.976,36.576 C64.1 ; v1(7.861,35.687) C57.2 ; v1(10.295,42.135) C75.2 10.414,41.156 U1.2 ; v1(11.544,43.688) C58.2 ; v1(11.545,42.672) C60.1 ; D4.3@27.424,27.184 v1(27.424,29.591) ; D5.3@30.218,27.184 30.218,26.551 v1(30.48,26.289) ; D2.3@33.012,27.184 33.012,26.805 v1(33.528,26.289) ; D3.3@35.806,27.184 v1(35.806,28.081) ; D1.3@58.059,20.181 58.172,20.181 v1(59.055,20.181)
  Top w0.508: W20.2 W20.1 ; v1(2.678,33.539) R80.1@4.064,33.539 ; v1(4.064,34.748) R80.1 R80.1@4.064,33.539 ; v1(5.374,33.539) R80.1@4.064,33.539 ; v1(8.636,49.519) R79.1 ; v1(10.033,48.26) R79.1 ; v1(11.343,49.519) R79.1 ; v1(38.227,27.178) T1.3 ; v1(38.718,17.958) 39.683,18.923 R12.1 ; v1(39.751,25.121) T1.3 ; v1(39.751,29.083) T1.3 ; IC1.4 v1(45.212,14.351) ; IC1.3 v1(45.212,15.621) ; v1(47.561,23.812) C16.1@49.53,23.812 ; v1(47.752,14.351) IC1.5 ; v1(49.53,25.273) C16.1 C16.1@49.53,23.812 ; v1(51.498,23.812) C16.1@49.53,23.812 ; IC2.3 v1(55.474,18.181)
  other v2: 59.182,1.27 62.738,1.27 62.23,21.082 21.082,24.384 24.638,24.384 44.704,24.384 56.388,24.384 66.294,26.924 63.302,26.943 1.27,33.782 1.27,44.45 19.558,44.45 1.27,49.53 6.096,49.53 19.558,49.53
I0: DE0.11 JDR1.14 R46.1 | length 43.2
  Top w0.203: v1(35.306,15.875) R46.1 ; JDR1.14@45.665,8.08 45.792,7.953 48.03,5.715 57.023,5.715 61.455,10.147 66.027,10.147 DE0.11
  Bottom w0.203: v1(35.306,15.875) 41.021,15.875 45.665,11.231 JDR1.14@45.665,8.08
I1: DE0.13 JDR1.10 R45.1 | length 65.1
  Top w0.203: JDR1.10@22.197,10.92 23.112,10.92 29.464,17.272 31.126,17.272 R45.1
  Bottom w0.203: JDR1.10@22.197,10.92 JDR1.10 22.197,7.366 24.489,5.074 62.261,5.074 63.302,6.115 63.302,6.775 64.013,7.487 65.907,7.487 DE0.13
I+: DE0.1 R13.1 R45.2 | length 38.5
  Top w0.203: R13.1 R45.2 32.777,20.193 v1(33.822,20.193)
  Bottom w0.203: v1(33.822,20.193) 34.33,20.701 55.372,20.701 57.753,23.082 66.262,23.082 DE0.1
I+_OUT: J9.3 R49.1 | length 2.7
  Top w0.203: R49.1@60.793,52.019 R49.1 J9.3
I-: DE0.3 R14.1 R46.2 | length 35.7
  Top w0.203: R14.1@35.306,22.468 R14.1 R46.2 35.698,20.066 v1(37.49,20.066)
  Bottom w0.203: v1(37.49,20.066) 55.409,20.066 58.019,22.676 66.224,22.676 DE0.3
I-_OUT: J9.1 R44.1 | length 2.7
  Top w0.203: R44.1@60.793,54.559 R44.1 J9.1
IDLE_B: C19.2 C20.2 R31.1 U21.24 | length 50.4
  Top w0.203: v1(8.247,18.952) C20.2 C19.2 R31.1 ; U21.24@36.314,46.409 36.314,47.932 v1(36.439,48.057)
  Bottom w0.203: v1(8.247,18.952) 8.247,20.312 11.557,23.622 11.557,29.591 14.097,32.131 19.558,32.131 28.956,41.529 28.956,42.545 32.131,45.72 34.229,45.72 36.439,47.93 v1(36.439,48.057)
IDLE_B_IN: DE0.6 JDR1.5 U23.11 | length 62.3
  Top w0.203: v1(12.954,19.685) U23.11 ; JDR1.5@36.002,10.92 36.066,10.92 38.608,13.462 60.743,13.462 63.378,16.097 63.378,17.658 DE0.6
  Bottom w0.203: v1(12.954,19.685) 12.954,17.856 18.491,12.319 34.671,12.319 36.002,10.988 JDR1.5@36.002,10.92
LD_OUT: DE0.20 JDR1.8 | length 43.4
  Top w0.203: JDR1.8@27.719,10.92 JDR1.8 27.719,6.825 32.493,2.051 63.989,2.051 DE0.20
LOCK_DET: DE0.8 JDR1.15 R59.1 | length 68.2
  Top w0.203: R59.1@9.895,17.653 9.895,15.378 10.668,14.605 20.828,14.605 v1(21.082,14.859) ; JDR1.15@42.904,8.08 42.904,12.17 43.637,12.903 61.163,12.903 DE0.8
  Bottom w0.203: v1(21.082,14.859) 21.336,14.605 39.751,14.605 42.904,11.452 JDR1.15@42.904,8.08
NETC6_1: C6.1 C10.1 R16.2 U8.4 | length 3.4
  Top w0.203: R16.2 C10.1 ; C10.1 C6.1 44.831,38.641 U8.4@44.819,38.641
NETC13_2: C13.2 R1.1 | length 3
  Top w0.203: R1.1 C13.2
NETC15_2: C15.2 U21.15 | length 2.4
  Top w0.203: U21.15@38.154,42.569 38.711,42.569 39.497,41.783 C15.2
NETC22_1: C22.1 C58.1 C60.2 U2.4 W16.1 | length 6.6
  Top w0.203: U2.4 13.312,44.816 C22.1 13.462,43.696 13.454,43.688 13.454,42.672 15.113,42.672 W16.1
NETC22_2: C22.2 U2.5 | length 1.8
  Top w0.203: U2.5 13.312,46.116 C22.2
NETC23_1: C23.1 C57.1 C64.2 U1.4 W17.1 | length 6
  Top w0.203: U1.4 9.764,36.583 C64.2 C57.1 10.93,35.687 C23.1 11.684,34.933 W17.1
NETC23_2: C23.2 U1.5 | length 1.4
  Top w0.203: C23.2 11.064,36.583 U1.5
NETC28_1: C28.1 R4.1 | length 1
  Top w0.203: C28.1@37.711,35.306 37.711,35.433 R4.1@37.711,36.322
NETC31_1: C31.1 U21.25 | length 3.4
  Top w0.254: U21.25 35.814,48.514 36.068,48.768 C31.1
NETC31_2: C31.2 C76.2 J6.1 L2.2 | length 14.6
  Top w0.254: C31.2 39.37,48.768 43.075,48.768 ccw(c43.075,49.635) 43.688,49.022 44.017,49.351 ccw(c43.566,49.802) 44.204,49.802 44.204,51.156 44.204,52.332 J6.1
NETC55_1: C55.1 C56.1 L2.1 U21.3 | length 18
  Top w0.203: v1(31.285,44.026) 31.672,44.413 32.037,44.413 32.192,44.569 U21.3 ; L2.1@39.37,47.768 40.386,47.768 41.275,47.768 42.126,47.768 v1(42.142,47.752)
  Bottom w0.203: v1(31.285,44.026) 31.328,44.069 31.328,44.155 32.385,45.212 34.544,45.212 37.465,48.133 41.761,48.133 v1(42.142,47.752)
NETC68_1: C68.1 L3.1 U10.1 | length 3.5
  Top w0.254: C68.1 25.654,48.768 ccw(c26.267,48.768) 25.834,48.334 ccw(c26.032,48.533) 26.032,48.252 L3.1 27.567,48.26 U10.1
NETC68_2: C68.2 J7.1 L5.2 | length 7.5
  Top w0.254: C68.2 25.654,51.156 25.654,52.57 25.646,52.578 25.646,57.65 J7.1
NETC69_1: C69.1 U21.27 | length 3.2
  Top w0.254: C69.1@33.647,48.768 34.29,48.768 34.544,48.514 34.544,47.371 34.814,47.101 U21.27
NETC69_2: C69.2 L4.1 U10.4 | length 3.3
  Top w0.203: U10.4@29.456,48.547 29.845,48.547 30.066,48.768 30.599,48.768 L4.1
  Top w0.254: L4.1 30.631,48.768 C69.2
NETC71_1: C71.1 L6.2 U11.1 | length 2.6
  Top w0.203: U11.1 30.226,44.569 30.615,44.958 L6.2 30.615,45.847 C71.1
NETC72_2: C72.2 L7.2 U11.4 | length 2.3
  Top w0.203: U11.4 30.226,43.569 L7.2 30.615,42.291 C72.2
NETC73_2: C73.2 L8.1 W16.2 | length 10
  Top w0.203: v1(23.551,45.485) 23.559,45.493 C73.2 L8.1
  Bottom w0.203: W16.2 16.11,45.485 v1(23.551,45.485)
NETIC1_1: IC1.1 T1.6 | length 4.9
  Top w0.203: IC1.1 44.628,18.161 44.831,18.364 T1.6
NETIC1_2: IC1.2 R3.1 R12.2 T1.5 | length 7.6
  Top w0.203: T1.5 42.291,20.574 41.667,19.95 R12.2 R3.1 IC1.2
NETIC1_6: IC1.6 R11.1 | length 2.4
  Top w0.203: IC1.6 51.424,15.621 R11.1
NETIC2_2: IC2.2 R11.2 | length 2.7
  Top w0.203: IC2.2 53.34,15.505 R11.2
NETL4_2: L4.2 U10.3 | length 1.3
  Top w0.203: U10.3@29.456,47.973 29.845,47.973 30.066,47.752 L4.2
NETL6_1: L6.1 U21.2 | length 1.9
  Top w0.203: L6.1@31.615,44.958 31.678,45.022 31.726,45.069 U21.2
NETL7_1: L7.1 U21.5 | length 2.1
  Top w0.203: L7.1@31.615,43.18 31.742,43.053 32.332,43.053 32.745,43.465 32.756,43.465 32.86,43.569 U21.5
NETR1_2: R1.2 T1.1 | length 3
  Top w0.203: T1.1 R1.2
NETR5_1: R5.1 R33.1 U23.8 | length 3.6
  Top w0.203: U23.8 14.433,25.654 R5.1@15.827,25.654
NETR6_1: R6.1 R32.1 U23.2 | length 11.7
  Top w0.203: U23.2 21.082,17.145 22.233,18.296 R6.1 22.098,25.687 R32.1
NETR7_1: R7.1 R10.1 U23.6 | length 12.6
  Top w0.203: R10.1@14.433,30.353 R7.1 15.827,30.353 15.827,30.02 16.637,29.21 17.907,29.21 18.542,28.575 18.542,22.428 18.745,22.225 U23.6
NETR8_1: R8.1 R31.2 U23.10 | length 4.3
  Top w0.203: R8.1@11.695,19.304 R31.2 11.822,20.955 U23.10
NETR9_2: R9.2 R59.2 U23.12 | length 4.7
  Top w0.203: R9.2@11.676,16.002 11.695,16.021 11.695,16.129 11.695,17.653 11.758,17.717 12.457,18.415 U23.12
NETR17_2: R17.2 U21.6 | length 21.8
  Top w0.203: R17.2 19.863,29.693 v1(20.168,29.997) ; v1(31.877,42.291) 32.131,42.291 32.909,43.069 U21.6
  Bottom w0.203: v1(20.168,29.997) 20.193,29.997 20.904,30.709 22.327,30.709 26.035,34.417 26.035,37.465 30.861,42.291 v1(31.877,42.291)
NETR30_1: R30.1 R34.1 U23.4 | length 13.4
  Top w0.203: R34.1@14.433,28.067 R30.1 15.827,28.067 15.827,27.762 16.122,27.468 17.323,27.468 17.526,27.264 17.526,19.939 17.78,19.685 U23.4
NETR60_2: R60.2 U1.3 U2.3 | length 7.5
  Top w0.203: U1.3 9.764,40.839 8.936,41.667 R60.2 8.001,43.815 9.002,44.816 U2.3
NETU21_26: U21.26 W23.2 | length 26.6
  Top w0.203: v1(35.189,48.082) 35.314,47.957 U21.26
  Bottom w0.203: W23.2 22.098,35.941 28.13,41.974 28.13,42.735 31.877,46.482 33.589,46.482 v1(35.189,48.082)
Q0: DE0.15 JDR1.11 R55.1 | length 66.8
  Top w0.203: JDR1.11@19.436,10.92 19.436,10.927 20.828,12.319 23.241,12.319 29.58,18.658 R55.1
  Bottom w0.203: JDR1.11@19.436,10.92 JDR1.11 19.436,7.234 22.003,4.667 62.54,4.667 63.175,5.302 66.262,5.302 DE0.15
Q1: DE0.17 JDR1.12 R50.1 | length 70.4
  Top w0.203: JDR1.12@16.675,10.92 18.836,13.081 22.479,13.081 26.924,17.526 R50.1
  Bottom w0.203: JDR1.12@16.675,10.92 JDR1.12 16.675,7.328 19.812,4.191 62.724,4.191 63.429,4.896 66.224,4.896 DE0.17
Q+: DE0.5 R15.1 R50.2 | length 44.2
  Top w0.203: R15.1 R50.2 28.321,19.061 v1(28.321,18.923)
  Bottom w0.203: v1(28.321,18.923) 28.829,19.431 61.956,19.431 62.838,20.314 66.046,20.314 DE0.5
Q+_OUT: J9.7 R51.1 | length 2.7
  Top w0.203: R51.1@60.793,46.939 60.92,46.939 J9.7
Q-: DE0.7 R18.1 R55.2 | length 41.5
  Top w0.203: R18.1 R55.2 30.988,19.188 v1(30.988,18.796)
  Bottom w0.203: v1(30.988,18.796) 63.092,18.796 64.064,17.824 65.996,17.824 DE0.7
Q-_OUT: J9.5 R53.1 | length 2.7
  Top w0.203: R53.1@60.793,49.479 60.92,49.479 J9.5
R1_IN: P1.1 U8.3 | length 7.9
  Top w0.203: v1(44.76,34.563) 44.819,34.622 U8.3@44.819,35.527
  Bottom w0.203: v1(44.76,34.563) 47.808,34.563 48.97,33.401 P1.1
R1_OUT: C15.1 J10.1 P1.2 | length 21.4
  Top w0.203: C15.1@41.267,41.783 42.898,41.783 v1(43.42,42.305) ; P1.2 54.432,34.112 J10.1
  Bottom w0.203: v1(43.42,42.305) 45.579,42.305 47.676,40.208 J10.1
S_CLK: R34.2 U21.9 W15.2 | length 38.2
  Top w0.203: W15.2 8.001,28.067 R34.2 12.633,28.067 12.633,28.858 12.893,29.119 v1(15.621,29.119) ; v1(32.759,41.021) 32.759,40.774 33.147,40.386 34.036,40.386 34.814,41.164 U21.9
  Bottom w0.203: v1(15.621,29.119) 17.795,29.119 18.872,28.042 22.225,28.042 28.423,34.239 28.423,36.297 32.759,40.633 v1(32.759,41.021)
SCLK_IN: DE0.14 JDR1.2 U23.3 | length 57.1
  Top w0.203: v1(18.485,18.415) U23.3 ; JDR1.2@44.285,10.92 JDR1.2 44.285,7.15 46.158,5.277 57.308,5.277 59.854,7.823 63.703,7.823 DE0.14
  Bottom w0.203: v1(18.485,18.415) 21.66,15.24 40.386,15.24 44.285,11.341 JDR1.2@44.285,10.92
SHDNB_IN: DE0.12 JDR1.1 U23.1 | length 48.6
  Top w0.203: U23.1 21.463,15.875 v1(22.098,16.51) ; JDR1.1@47.046,10.92 48.623,12.497 63.703,12.497 DE0.12
  Bottom w0.203: v1(22.098,16.51) 41.456,16.51 JDR1.1@47.046,10.92
TP2(T_SEN): R20.2 U21.28 | length 1.8
  Top w0.203: R20.2 32.558,46.409 U21.28
TP3(CP_OUT): C24.1 R4.2 U21.12 | length 6
  Top w0.203: U21.12@36.314,41.729 36.314,40.574 36.068,40.329 36.068,37.541 36.271,37.338 C24.1 R4.2 R4.2@36.711,36.322
TP10(LOCK_DET): R17.1 U23.13 | length 13.3
  Top w0.203: U23.13 16.434,17.145 16.637,17.348 v1(16.637,22.352) ; v1(19.812,25.654) 19.863,25.705 R17.1
  Bottom w0.203: v1(16.637,22.352) 19.812,25.527 v1(19.812,25.654)
TP15(SHDN_B): R32.2 U21.7 | length 20.2
  Top w0.203: v1(21.692,29.972) 22.098,29.566 R32.2 ; v1(32.639,41.928) 32.639,42.164 33.044,42.569 U21.7@33.474,42.569
  Bottom w0.203: v1(21.692,29.972) 22.276,29.972 26.645,34.341 26.645,37.313 30.988,41.656 32.367,41.656 v1(32.639,41.928)
VCC_A: C1.1 C3.1 C5.1 C7.1 C8.1 C12.1 C14.1 C50.1 C74.2 L8.2 R16.1 U21.4 U21.11 U21.13 U21.23 | length 52.1
  Top w0.305: v1(32.247,43.826) 32.49,44.069 U21.4 ; 35.814,40.767 U21.11 ; C12.1 36.814,40.108 U21.13 ; U21.23 36.814,46.847 36.816,46.849 36.816,47.066 37.219,47.469 v1(37.719,47.469)
  Top w0.381: v1(33.557,39.108) C7.1 C14.1 35.306,40.259 35.814,40.767 ; C12.1 C3.1 36.711,38.441 v1(37.023,38.129)
  Top w0.508: v1(42.037,40.513) 42.664,41.14 R16.1
  Top w0.635: v1(24.44,41.421) 24.448,41.429 C74.2 24.44,42.191 L8.2
  Inner Layer 3 w0.635: v1(24.44,41.421) 24.44,40.278 25.61,39.108 30.861,39.108 ; v1(37.719,47.469) 36.986,46.736 35.157,46.736 v1(32.247,43.826) 30.861,42.44 30.861,39.108 ; v1(42.037,40.513) 42.037,38.735 41.431,38.129 v1(37.023,38.129) 36.044,39.108 v1(33.557,39.108) 30.861,39.108
  Bottom w0.381: v1(32.247,43.826) 32.482,44.061 C5.1 C50.1 ; C8.1 C1.1 37.473,47.223 v1(37.719,47.469)
VCC_D_IN: C2.1 C4.1 C9.1 C11.1 C16.2 IC1.8 IC2.5 R3.2 R5.2 R6.2 R7.2 R8.2 R9.1 R30.2 U21.14 U21.19 U23.14 W13.3 W14.3 W15.3 W17.2 W23.3 | length 45.5
  Top w0.305: U21.14 37.314,41.299 37.719,40.894 ; U21.19 38.87,44.569
  Top w0.381: R6.2 23.233,24.646 v1(23.241,24.638) ; 38.87,44.569 40.275,44.569 C4.1
  Top w0.508: v1(9.779,19.304) R8.2 R8.2@10.695,19.304 ; R9.1@10.676,16.002 10.676,15.748 11.184,15.24 12.319,15.24 v1(12.954,15.875) U23.14 ; v1(16.827,24.511) R5.2@16.827,25.654 ; R30.2@16.827,28.067 v1(17.78,28.067) ; R7.2@16.827,30.353 v1(17.78,30.353) ; v1(36.779,17.805) 37.236,17.805 38.151,16.891 R3.2
  Top w0.762: 37.719,40.894 38.354,40.894 38.989,40.259 C9.1 C2.1 v1(39.878,40.906) ; C4.1 C11.1 41.529,44.204 v1(41.529,42.672)
  Bottom w0.762: v1(33.807,22.86) 33.807,24.663 39.878,30.734 v1(39.878,40.906) 39.878,41.015 41.148,42.285 41.148,42.291 v1(41.529,42.672)
  other v1: 47.524,21.306 46.609,21.336 47.523,22.22 46.609,22.25
pads on no net: DE0.4 IC1.7 IC2.1 JDR1.6 JDR1.7 JDR1.9 JDR1.16 JDR1.17 JDR1.18 JDR1.19 JDR1.20 JDR1.21 JDR1.22 JDR1.23 JDR1.24 JDR1.25 T1.2 T1.4 U8.1 U21.1 U21.22 U21.29

## Polygon pours and split planes (outlines as drawn)
AGND on Inner Layer 3 "Top-No Net" (solid, remove dead copper, pour order 16): 21.463,40.894 21.463,41.529 21.463,41.91 21.463,50.292 21.209,50.546 20.574,50.546 0.635,50.546 0.508,50.673 0.508,51.13 0.508,62.103 0.889,62.484 2.54,62.484 67.945,62.484 68.072,62.357 68.072,61.976 68.072,57.658 68.072,32.131 67.818,31.877 67.437,31.877 21.971,31.877 21.463,32.385 21.463,33.655
VCC_D_IN on Inner Layer 3 "Top-No Net" (solid, remove dead copper, pour order 23): 16.129,0.508 13.462,0.508 0.763,0.508 0.508,0.763 0.508,1.097 0.508,49.911 0.762,50.165 1.524,50.165 19.812,50.165 20.955,50.165 21.209,49.911 21.209,49.149 21.209,32.131 21.717,31.623 22.86,31.623 67.826,31.623 68.072,31.377 68.072,22.692 68.072,0.762 67.818,0.508 67.437,0.508 16.51,0.508
GND on Top "Top-No Net" (solid, pour order 19): 3.175,50.292 0.635,50.292 0.508,50.165 0.508,49.784 0.508,33.02 0.635,32.893 1.27,32.893 4.953,32.893 5.479,32.367 5.479,23.894 5.57,23.804 5.752,23.622 5.842,23.622 8.133,23.622 12.573,23.622 37.338,23.622 37.846,23.114 37.846,22.444 37.846,14.508 38.384,13.97 39.624,13.97 57.277,13.97 57.658,13.589 57.658,13.145 57.658,0.763 57.913,0.508 58.928,0.508 67.818,0.508 68.072,0.762 68.072,1.27 68.072,31.369 67.818,31.623 67.564,31.623 66.929,31.623 64.389,31.623 21.717,31.623 21.209,32.131 21.209,32.766 21.209,33.147 21.209,50.038 21.209,50.165 21.082,50.292 3.81,50.292
AGND on Top "Top-No Net" (solid, remove dead copper, pour order 15): 21.463,40.894 21.463,41.529 21.463,41.91 21.463,50.292 21.209,50.546 20.574,50.546 0.635,50.546 0.508,50.673 0.508,51.13 0.508,62.103 0.889,62.484 2.54,62.484 67.945,62.484 68.072,62.357 68.072,61.976 68.072,57.658 68.072,32.131 67.818,31.877 67.437,31.877 21.971,31.877 21.463,32.385 21.463,33.655
DGND on Top "INNER LAYER 2-DGND" (solid, remove dead copper, pour order 24): 503 vertices, not listed, extent 0.508,0.509 57.15,32.512
VCC_D_IN on Top "TOP-VCC_D_IN" (solid, pour order 20): 46.355,17.78 46.228,17.907 46.228,22.352 46.419,22.543 47.751,22.543 47.751,22.542 51.309,22.542 51.309,22.543 52.667,22.543 52.832,22.377 52.832,19.812 52.705,19.685 50.8,19.685 50.165,19.05 50.165,17.907 50.038,17.78 46.355,17.78
GND on Inner Layer 2 "Top-No Net" (solid, remove dead copper, pour order 18): 3.175,50.292 0.635,50.292 0.508,50.165 0.508,49.784 0.508,33.02 0.635,32.893 1.27,32.893 4.953,32.893 5.479,32.367 5.479,23.894 5.57,23.804 5.752,23.622 5.842,23.622 8.133,23.622 12.573,23.622 37.338,23.622 37.846,23.114 37.846,22.444 37.846,14.508 38.384,13.97 39.624,13.97 57.277,13.97 57.658,13.589 57.658,13.145 57.658,0.763 57.913,0.508 58.928,0.508 67.818,0.508 68.072,0.762 68.072,1.27 68.072,31.369 67.818,31.623 67.564,31.623 66.929,31.623 64.389,31.623 21.717,31.623 21.209,32.131 21.209,32.766 21.209,33.147 21.209,50.038 21.209,50.165 21.082,50.292 3.81,50.292
AGND on Inner Layer 2 "Top-No Net" (solid, remove dead copper, pour order 14): 21.463,40.894 21.463,41.529 21.463,41.91 21.463,50.292 21.209,50.546 20.574,50.546 0.635,50.546 0.508,50.673 0.508,51.13 0.508,62.103 0.889,62.484 2.54,62.484 67.945,62.484 68.072,62.357 68.072,61.976 68.072,57.658 68.072,32.131 67.818,31.877 67.437,31.877 21.971,31.877 21.463,32.385 21.463,33.655
DGND on Inner Layer 2 "INNER LAYER 2-DGND" (solid, remove dead copper, pour order 22): 503 vertices, not listed, extent 0.508,0.509 57.15,32.512
GND on Bottom "Top-No Net" (solid, remove dead copper, pour order 17): 3.175,50.292 0.635,50.292 0.508,50.165 0.508,49.784 0.508,33.02 0.635,32.893 1.27,32.893 4.953,32.893 5.479,32.367 5.479,23.894 5.57,23.804 5.752,23.622 5.842,23.622 8.133,23.622 12.573,23.622 37.338,23.622 37.846,23.114 37.846,22.444 37.846,14.508 38.384,13.97 39.624,13.97 57.277,13.97 57.658,13.589 57.658,13.145 57.658,0.763 57.913,0.508 58.928,0.508 67.818,0.508 68.072,0.762 68.072,1.27 68.072,31.369 67.818,31.623 67.564,31.623 66.929,31.623 64.389,31.623 21.717,31.623 21.209,32.131 21.209,32.766 21.209,33.147 21.209,50.038 21.209,50.165 21.082,50.292 3.81,50.292
AGND on Bottom "Top-No Net" (solid, pour order 13): 21.463,40.894 21.463,41.529 21.463,41.91 21.463,50.292 21.209,50.546 20.574,50.546 0.635,50.546 0.508,50.673 0.508,51.13 0.508,62.103 0.889,62.484 2.54,62.484 67.945,62.484 68.072,62.357 68.072,61.976 68.072,57.658 68.072,32.131 67.818,31.877 67.437,31.877 21.971,31.877 21.463,32.385 21.463,33.655
DGND on Bottom "INNER LAYER 2-DGND" (solid, remove dead copper, pour order 21): 503 vertices, not listed, extent 0.508,0.509 57.15,32.512

## Keep-outs
Keep-Out Layer:
  the board outline again, w0.102

## Other copper
Top:
  text "#1 COMPONENT SIDE" at 11.938,-4.572 h0.64
Inner Layer 2:
  text "#2 GND PLANE" at 11.938,-4.572 h0.64
Inner Layer 3:
  text "#3 POWER PLANE" at 11.938,-4.572 h0.64
Bottom:
  text "#4 SOLDER SIDE" at 38.862,-4.572 h0.64
Multi-Layer:
  circle w0.254: c-2.54,66.032 r2.54
  circle w0.254: c71.12,66.032 r1.27
  circle w0.254: c-2.54,-3.818 r2.54
  circle w0.254: c71.12,66.032 r2.54
  circle w0.254: c-2.54,-3.818 r1.27
  circle w0.254: c-2.54,66.032 r1.27
  lines w0.254: -5.715,-3.818 -3.81,-3.818 ; -5.715,66.032 -3.81,66.032 ; -3.175,-3.818 -1.905,-3.818 ; -3.175,66.032 -1.905,66.032 ; -2.54,-6.993 -2.54,-5.088 ; -2.54,-4.453 -2.54,-3.183 ; -2.54,-2.548 -2.54,-0.643 ; -2.54,62.857 -2.54,64.762 ; -2.54,65.397 -2.54,66.667 ; -2.54,67.302 -2.54,69.207 ; -1.27,-3.818 0.635,-3.818 ; -1.27,66.032 0.635,66.032 ; 67.945,66.032 69.85,66.032 ; 70.485,66.032 71.755,66.032 ; 71.12,62.857 71.12,64.762 ; 71.12,65.397 71.12,66.667 ; 71.12,67.302 71.12,69.207 ; 72.39,66.032 74.295,66.032

## Silkscreen, mask and mechanical layers (free items; w line width, h text height)
Silkscreen Top:
  text "1" at 63.195,56.337 h0.64
  text "2" at 65.862,56.337 h0.64
  text "GND" at 2.667,44.196 h0.64 r90
  text "+3.3V" at 4.699,43.942 h0.64 r90
  text "1" at 6.35,43.942 h0.64
  text "1" at 17.526,42.926 h0.64
  text "9" at 63.195,41.986 h0.64
  text "10" at 65.735,41.859 h0.64
  text "1" at 17.653,38.354 h0.64
  text "1" at 13.335,33.02 h0.64
  text "1" at 3.683,21.59 h0.64
  text "13" at 13.462,12.7 h0.64
  text "1" at 47.244,12.7 h0.64
  text "25" at 14.732,5.842 h0.64
  text "14" at 45.339,5.715 h0.64
  text "SILKSCREEN" at 13.97,-4.572 h0.64
Silkscreen Bottom:
  text "2" at 64.902,25.749 h0.64
  text "1" at 67.569,25.749 h0.64
  text "20" at 63.099,0.959 h0.64
  text "SILKSCREEN BOTTOM SIDE" at 50.038,-4.572 h0.64
Solder Mask Bottom:
  text "SOLDER MASK" at 34.798,-4.572 h0.64
Mechanical 2:
  the board outline again, w0.102
Assembly Drawing Top:
  lines w0: 22.154,52.658 22.154,32.658 47.154,32.658
  text "COMPONENT MASK" at 13.97,-4.572 h0.64
Drill Drawing:
  text ".Legend" at 89.23,-0.203 h1.52
  text "DRILL  DRAWING" at 13.97,-4.572 h0.64